# EAGLE board team18 (EAGLE 8.4.3)
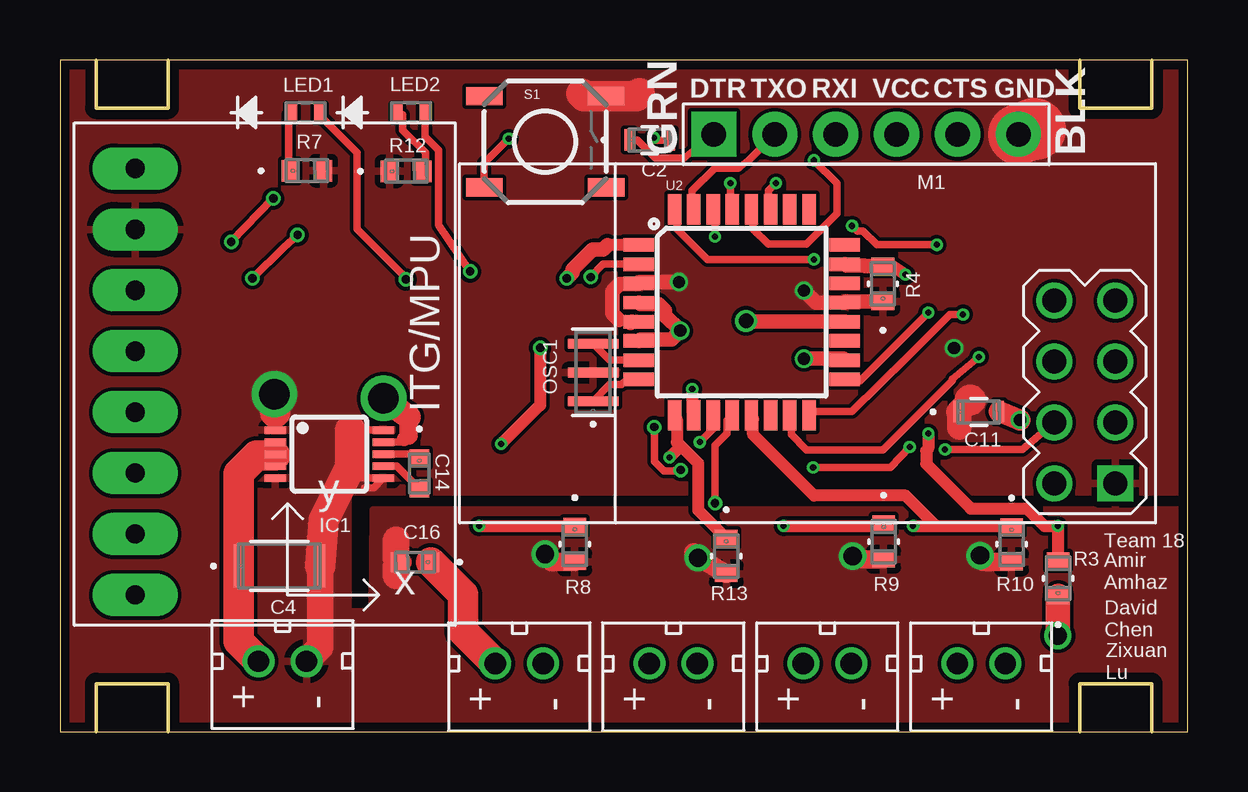
[diagram p0: board, top side]
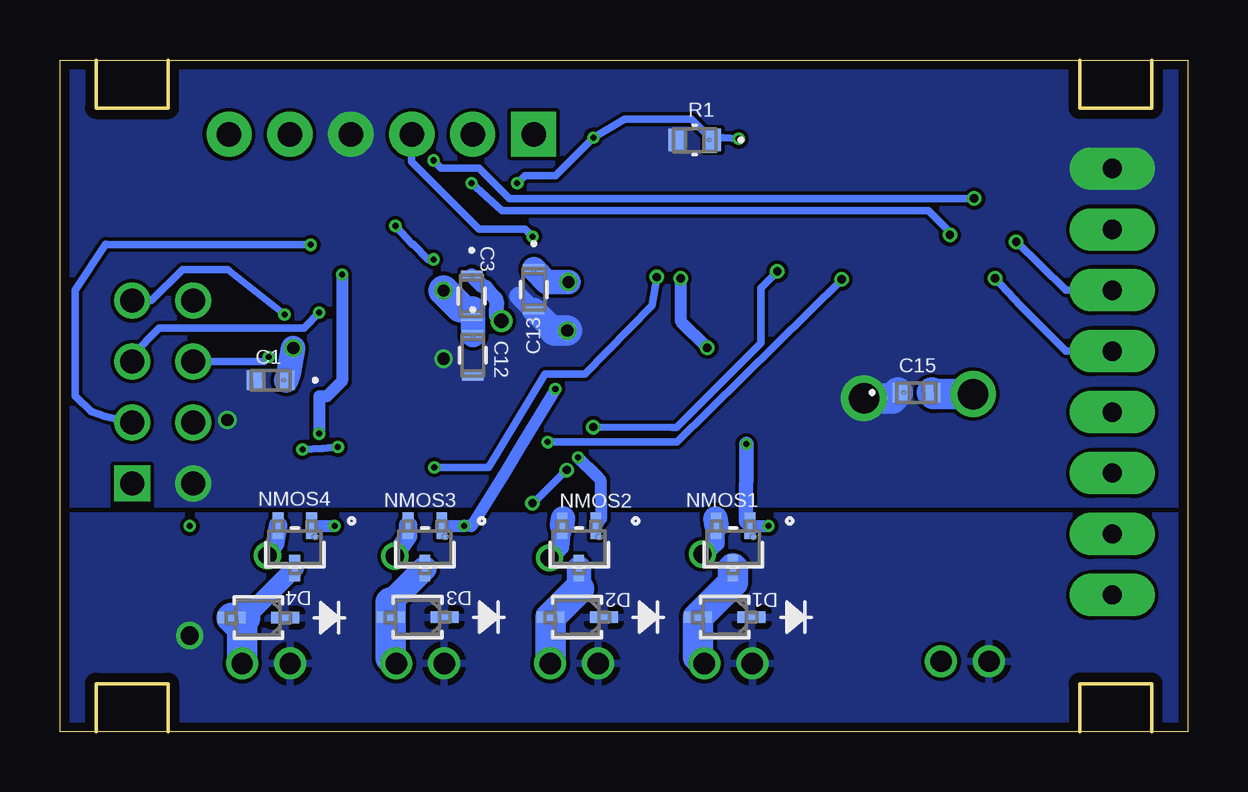
[diagram p1: board, bottom side, seen from below]

Size 47 x 28 mm. Coordinates in mm from the lower left corner, seen from the top.
Outline: 1.5,0 0,0 0,28 1.5,28
Outline: 1.5,0 4.5,0
Outline: 4.5,0 42.5,0
Outline: 42.5,0 45.5,0
Outline: 45.5,0 47,0 47,28 45.5,28
Outline: 45.5,28 42.5,28
Outline: 42.5,28 4.5,28
Outline: 4.5,28 1.5,28
Outline: 1.5,0 1.5,2 4.5,2 4.5,0
Outline: 45.5,0 45.5,2 42.5,2 42.5,0
Outline: 45.5,28 45.5,26 42.5,26 42.5,28
Outline: 1.5,28 1.5,26 4.5,26 4.5,28
Copper layers (1*16): Top 0.035559375mm / dielectric 1.6mm / Bottom 0.035559375mm
Design rules "oshpark-2layer": minimum track width 6mil, minimum drill 10mil, track to track 6mil, track to pad 6mil, pad to pad 6mil, via to via 6mil, smd to smd 6mil, copper to edge 15mil, drill to drill 6mil, minimum pad ring 5mil, minimum via ring 5mil, stop-mask expansion 2.5mil, vias tented up to drill 0mil, thermal gap 10mil
Net classes: 0 default: width 0.025 mm; 1 digital: width 0.025 mm; 2 analog: width 0.025 mm; 3 power: width 0.025 mm

## Footprints (pad centres in the part's own frame; a part is rotated, then mirrored left to right if it is on the bottom)
JST_CONNECTOR_FEMALE = drill 0.889: + 0,1; - 0,-1
G-188 = smd 0.711 x 0.813: 1 -0.648,0; 2 0.648,0
CAP_1608 = smd 0.406 x 0.889: 1 -0.851,0; 2 0.851,0
CAP_3216 = smd 0.406 x 1.803: 1 -1.702,0; 2 1.702,0
SOD-323 = smd 1.168 x 0.483: 1 -1.118,0; 2 1.118,0
UMAX10 = smd 0.32 x 0.9: 1 -1,-2.25; 2 -0.5,-2.25; 3 0,-2.25; 4 0.5,-2.25; 5 1,-2.25; 6 1,2.25; 7 0.5,2.25; 8 0,2.25; 9 -0.5,2.25; 10 -1,2.25
FTDI_DEVICE_SIDE = drill 1.016 pad 1.88 square: P$1 -6.35,0 | drill 1.016 pad 1.88: P$2 -3.81,0; P$3 -1.27,0; P$4 1.27,0; P$5 3.81,0; P$6 6.35,0
LED_DIALIGHT_598 = smd 0.445 x 0.711: 1 -0.578,0; 2 0.578,0
WIRELESS-NRF24L01 = drill 1 square: 1 -12.7,6.35 | drill 1: 2 -10.16,6.35; 3 -12.7,3.81; 4 -10.16,3.81; 5 -12.7,1.27; 6 -10.16,1.27; 7 -12.7,-1.27; 8 -10.16,-1.27
SOT-323W/NEW = smd 0.451 x 1.111: 1 -0.7,-0.9; 2 0.7,-0.9; 3 0.011,0.878
CSTCE = smd 0.406 x 2.108: 1 -1.2,0; 2 0,0; 3 1.2,0
0603 = smd 0.703 x 0.95: 1 -0.737,0; 2 0.737,0
BO_CR0603 = smd 0.711 x 0.889: 1 -0.699,0; 2 0.699,0
TACTILE_SWITCH_SMD = smd 1.524 x 0.762: 1 -2.54,1.905; 2 2.54,1.905; 3 -2.54,-1.905; 4 2.54,-1.905
GY-521 = drill 0.8 pad 1.778 long: ADO -8.89,-6.35; GND -8.89,6.35; INT -8.89,-8.89; SCL -8.89,3.81; SDA -8.89,1.27; VCC -8.89,8.89; XCL -8.89,-3.81; XDA -8.89,-1.27
TQFP32-08 = smd 1.27 x 0.559: 1 -4.293,2.8; 2 -4.293,2; 3 -4.293,1.2; 4 -4.293,0.4; 5 -4.293,-0.4; 6 -4.293,-1.2; 7 -4.293,-2; 8 -4.293,-2.8; 17 4.293,-2.8; 18 4.293,-2; 19 4.293,-1.2; 20 4.293,-0.4; 21 4.293,0.4; 22 4.293,1.2; 23 4.293,2; 24 4.293,2.8 | smd 0.559 x 1.27: 9 -2.8,-4.293; 10 -2,-4.293; 11 -1.2,-4.293; 12 -0.4,-4.293; 13 0.4,-4.293; 14 1.2,-4.293; 15 2,-4.293; 16 2.8,-4.293; 25 2.8,4.293; 26 2,4.293; 27 1.2,4.293; 28 0.4,4.293; 29 -0.4,4.293; 30 -1.2,4.293; 31 -2,4.293; 32 -2.8,4.293

## Placement (x,y rotation side)
BATTERY  JST_CONNECTOR_FEMALE  [JST_CONNECTOR_FEMALE]  9.27,2.93 90 top
C1  10µF  [G-188]  38.21,14.64 180 bottom
C2  100nF  [CAP_1608]  24.58,24.66 0 top
C3  100nF  [CAP_1608]  29.84,18.16 270 bottom
C4  100µF  [CAP_3216]  9.14,6.9 0 top
C11  100nF  [CAP_1608]  38.3,13.33 0 top
C12  100nF  [CAP_1608]  29.79,15.69 270 bottom
C13  100nF  [CAP_1608]  27.25,18.43 270 bottom
C14  0.33µF  [G-188]  14.98,10.76 270 top
C15  10µF  [G-188]  11.29,14.13 0 bottom
C16  10µF  [G-188]  14.8,7.07 180 top
D1  [SOD-323]  19.29,4.77 180 bottom
D2  [SOD-323]  25.44,4.77 180 bottom
D3  [SOD-323]  32.09,4.77 180 bottom
D4  [SOD-323]  38.73,4.74 180 bottom
IC1  MAX1759  [UMAX10]  11.22,11.57 270 top
J1  FTDI_DEVICE  [FTDI_DEVICE_SIDE]  33.6,24.9 0 top
LED1  [LED_DIALIGHT_598]  10.24,25.81 0 top
LED2  [LED_DIALIGHT_598]  14.64,25.81 0 top
M1  WIRELESS-NRF24L01  [WIRELESS-NRF24L01]  31.29,16.69 180 top
MOTOR1  JST_CONNECTOR_FEMALE  [JST_CONNECTOR_FEMALE]  19.14,2.84 90 top
MOTOR2  JST_CONNECTOR_FEMALE  [JST_CONNECTOR_FEMALE]  25.56,2.84 90 top
MOTOR3  JST_CONNECTOR_FEMALE  [JST_CONNECTOR_FEMALE]  31.98,2.84 90 top
MOTOR4  JST_CONNECTOR_FEMALE  [JST_CONNECTOR_FEMALE]  38.4,2.84 90 top
NMOS1  DMN3065LW-7  [SOT-323W/NEW]  18.94,7.69 180 bottom
NMOS2  DMN3065LW-7  [SOT-323W/NEW]  25.36,7.69 180 bottom
NMOS3  DMN3065LW-7  [SOT-323W/NEW]  31.78,7.69 180 bottom
NMOS4  DMN3065LW-7  [SOT-323W/NEW]  37.2,7.69 180 bottom
OSC1  [CSTCE]  22.22,14.97 90 top
R1  10K  [0603]  20.54,24.66 180 bottom
R3  10K  [0603]  41.6,6.38 90 top
R4  10K  [0603]  34.3,18.66 90 top
R7  330  [BO_CR0603]  10.29,23.38 0 top
R8  10K  [0603]  21.46,7.82 270 top
R9  10K  [0603]  34.33,7.92 270 top
R10  10K  [0603]  39.66,7.81 270 top
R12  330  [BO_CR0603]  14.43,23.36 0 top
R13  10K  [0603]  27.77,7.32 270 top
S1  [TACTILE_SWITCH_SMD]  20.22,24.59 0 top
U1  GY-521MPU6050  [GY-521]  12.02,14.59 0 top
U2  ATMEGA328P_TQFP  [TQFP32-08]  28.42,17.49 0 top

## Library data of the parts
BATTERY J1 M1 MOTOR1-MOTOR4 U1 = quad
C1 C15 C16 = Capacitor 10uF; MANUFACTURER_PART_NUMBER: GRM188R60J106ME47D; VENDOR: Murata
C2 C3 C11-C13 = Capacitor 100nF; MANUFACTURER_PART_NUMBER: C1608X5R1H104K080AA; VENDOR: TDK
C4 = Capacitor 100uF; MANUFACTURER_PART_NUMBER: C3216X5R0J107M160AB; VENDOR: TDK
C14 = Capacitor 0.33uF; MANUFACTURER_PART_NUMBER: GRM188R71C334KA01D; VENDOR: Murata
D1-D4 = Diode; MANUFACTURER_PART_NUMBER: BAT60JFILM; VENDOR: STMicroelectronics
IC1 = maxim; MF: MAXIM; MPN: MAX1759EUB+; OC_FARNELL: 1593325; OC_NEWARK: 61H9447
LED1 = LED Red; MANUFACTURER_PART_NUMBER: 5988070107F; VENDOR: Dialight
LED2 = LED Green; MANUFACTURER_PART_NUMBER: 5988070107F; VENDOR: Dialight
NMOS1-NMOS4 = NMOS
OSC1 = Resonator; MANUFACTURER_PART_NUMBER: CSTCE8M00G52R0; VENDOR: Murata
R1 R3 R4 R8-R10 R13 = Resistor 10K; MANUFACTURER_PART_NUMBER: MCT06030C1002FP500; VENDOR: Vishay
R7 R12 = Resistor 330; MANUFACTURER_PART_NUMBER: CR0603JW331ELF; VENDOR: Bourns Electronics
S1 = SparkFun
U2 = quad; PROD_ID: IC-09069

## Nets
CE [digital]: M1.3 U2.32
CSN [digital]: M1.4 U2.2
GND [power]: BATTERY.- C1.1 C3.2 C4.2 C11.1 C12.1 C13.1 C15.2 C16.2 IC1.1 IC1.5 IC1.6 IC1.10 J1.P$6 M1.1 NMOS1.2 NMOS2.2 NMOS3.2 NMOS4.2 OSC1.2 R4.1 R7.2 R8.2 R9.2 R10.2 R12.1 R13.2 S1.2 U1.GND U2.3 U2.5 U2.21
MISO [digital]: M1.7 U2.16
MOSI [digital]: M1.6 U2.15
MOTORPWM1 [analog]: NMOS1.1 R8.1 U2.1
MOTORPWM2 [analog]: NMOS2.1 R13.1 U2.9
MOTORPWM3 [analog]: NMOS3.1 R9.1 U2.10
MOTORPWM4 [analog]: NMOS4.1 R10.1 U2.13
N$1 [power]: D2.2 MOTOR2.- NMOS2.3
N$2 [power]: C14.1 IC1.8
N$3 [power]: D3.2 MOTOR3.- NMOS3.3
N$4 [power]: D4.2 MOTOR4.- NMOS4.3
N$5 [digital]: C2.2 R1.1 S1.3 U2.29
N$6 [power]: D1.2 MOTOR1.- NMOS1.3
N$7 [digital]: C2.1 J1.P$1
N$8 [power]: C14.2 IC1.7
N$9 [digital]: LED1.2 U2.11
N$11 [digital]: LED2.2 U2.12
N$12 [power]: C3.1 U2.20
N$13 [digital]: LED1.1 R7.1
N$14 [digital]: OSC1.3 U2.7
N$15 [digital]: OSC1.1 U2.8
N$16 [digital]: LED2.1 R12.2
RX1 [digital]: J1.P$3 U2.30
SCK [digital]: M1.5 U2.17
SCL [digital]: U1.SCL U2.28
SDA [digital]: U1.SDA U2.27
TX0 [digital]: J1.P$2 U2.31
VBAT [power]: BATTERY.+ C4.1 C16.1 D1.1 D2.1 D3.1 D4.1 IC1.2 IC1.3 IC1.4 MOTOR1.+ MOTOR2.+ MOTOR3.+ MOTOR4.+ R3.1
VOLTAGEDIVIDER [analog]: R3.2 R4.2 U2.23
VREG [power]: C1.2 C11.2 C12.2 C13.2 C15.1 IC1.9 J1.P$4 M1.2 R1.2 U1.VCC U2.4 U2.6 U2.18

## Tracks (layer width: path | path; a pad name or v marks a point on that pad's centre or on a via)
CE  (via drill 0.25)
  Top 0.305: v31.43,19.68 26.99,19.68 25.72,20.95 25.72,21.59 U2.32 | v33.02,21.08 33.23,20.87 33.48,20.87 34.05,20.3 v36.55,20.3
  Bottom 0.305: v31.43,19.68 31.65,19.68 32.28,20.32 32.31,20.3 v33.02,21.08 | M1.3 45.11,13.13 45.71,13.34 46.35,13.98 46.35,18.41 45.09,20.32 45.06,20.3 v36.55,20.3
CSN  (via drill 0.25, 0.35)
  Top 0.305: v36.89,11.76 40.12,11.76 M1.4 41.45,12.87 M1.4 | 23.81,19.37 U2.2 | U2.2 24.07,19.43 | v22.12,18.95 22.64,19.49 U2.2 | v31.39,11.01 34.62,11.01 v35.42,11.86
  Bottom 0.305: v22.12,18.95 22.33,17.75 25.11,14.9 26.77,14.9 29.13,11.01 v31.39,11.01 | v35.42,11.86 36.05,11.81 v36.89,11.76
GND  (via drill 0.51, 0.76, 1.27)
  Top 0.254: C16.2 14,6.91 | C11.1 37.49,13.28
  Top 0.305: IC1.10 12.1,12.57 12.09,12.57 | 11.99,10.83 11.75,10.57 IC1.6 13.07,10.16 12.7,10.16 | IC1.1 8.97,13.3 8.97,13.31
  Top 0.61: 23.85,17.09 23.79,17.02 | 23.3,17.15 23.04,17.42 23.04,18.36 23.33,18.65 24.09,18.65 U2.3 24.19,18.75 v25.81,18.75 | v31.01,18.39 31.52,17.89 U2.21 32.75,17.93 R4.1
  Top 0.762: R8.2 20.48,7.08 v20.22,7.39 | R13.2 26.83,7.14 26.72,7.14 26.4,7.47 v26.59,7.24 | R9.2 33.45,7.19 v33.05,7.32 | R10.2 38.5,7.07 v38.35,7.34
  Top 1: C16.2 14,7.22
  Top 1.016: 37.49,13.28 37.49,12.68 | C11.1 37.93,13.82
  Top 1.1: 14,7.22 14,8 | BATTERY.- 10.85,3.5 C4.2 | 14,6.91 14,6.5
  Top 1.27: 12.1,12.57 12.09,12.56 12.09,10.97 11.99,10.83 10.99,8.79 C4.2 | v8.94,14.07 8.97,14.05 8.97,13.31 | 24.16,26.62 24.03,26.49 S1.2 21.84,26.49 21.74,26.59 | 37.93,13.82 37.97,13.82
  Top 2.54: J1.P$6 40.61,25.15 40.66,25.09
  Bottom 0.762: v20.22,7.39 19.68,7.87 19.68,8.89 | v26.59,7.24 26.16,7.7 26.04,8.89 | v33.05,7.32 32.48,8.16 NMOS3.2 | v38.35,7.34 38.03,7.84 NMOS4.2
  Bottom 1.016: C12.1 29.79,17.64 C3.2 30.31,17.69 | C13.1 26.71,18.75 v25.81,18.75 | v37.27,15.99 37.47,14.92 C1.1 | 19.68,8.89 NMOS1.2 | 26.04,8.89 NMOS2.2
  Bottom 1.27: v8.94,14.07 10.59,14.07 C15.2 | 30.31,17.69 v31.01,18.39
  pour Top (rank 2): 13.55,0 9.3,-0.05 9.25,5 13,5 13.05,9.25 47,9.25 47,0
  pour Top (rank 2): 0,28 47,28 47,10 12,10 12,0 0,0
MISO  (via drill 0.25)
  Top 0.305: U2.16 31.43,13.34 33.02,13.34 35.31,15.61 37.09,17.39 v37.64,17.39
  Bottom 0.305: v37.64,17.39 40.01,19.27 41.89,19.27 43.19,17.96 M1.7
MOSI  (via drill 0.25)
  Top 0.305: U2.15 30.48,13.02 30.48,12.38 31.11,11.75 34.31,11.75 37.2,14.64 37.2,14.69 v38.3,15.62
  Bottom 0.305: 38.18,15.67 v38.3,15.62 38.5,15.42 M1.6
MOTORPWM1  (via drill 0.25, 0.35)
  Top 0.508: v17.46,8.57 21.27,8.57 R8.1 | U2.1 22.82,20.29 | v20.02,16 20.02,13.61 v18.39,11.99
  Top 0.61: 22.82,20.29 22.63,20.1 22.38,20.1 22.37,20.09 22.19,20.09 21.36,19.26 21.36,19.13 v21.13,18.9
  Bottom 0.508: v17.46,8.57 18.1,8.57 NMOS1.1 | v21.13,18.9 21.13,17.12 v20.02,16
  Bottom 0.61: v18.39,11.99 18.41,8.76 NMOS1.1
MOTORPWM2  (via drill 0.25)
  Top 0.508: 25.88,11.91 25.72,12.06 25.72,13.02 U2.9 | 25.88,11.91 v25.4,11.43 | 25.88,11.91 26.59,11.19 26.59,9.23 R13.1
  Bottom 0.508: NMOS2.1 24.45,8.89 24.47,10.49 24.64,10.67 v25.4,11.43
MOTORPWM3  (via drill 0.25)
  Top 0.508: v30.16,8.57 34.29,8.57 R9.1 | v26.35,14.29 26.35,13.34 U2.10
  Bottom 0.508: NMOS3.1 31.11,8.57 v30.16,8.57 29.84,8.57 28.55,10.64 27.65,12.13 v26.35,14.29
MOTORPWM4  (via drill 0.25)
  Top 0.508: v35.56,8.57 36.51,8.57 | 36.51,8.57 39.37,8.57 R10.1 | 36.51,8.57 35.24,9.84 31.43,9.84 28.89,12.38 28.89,13.02 U2.13
  Bottom 0.508: v35.56,8.57 36.51,8.57 NMOS4.1
N$1
  Bottom 1.016: NMOS2.3 25.38,5.95
  Bottom 1.27: 25.38,5.95 D2.2 MOTOR2.-
N$2
  Top 0.305: IC1.8 14.54,11.57 C14.1
N$3
  Bottom 1.016: NMOS3.3 33.21,5.39
  Bottom 1.27: 33.21,5.39 D3.2 33.21,3.06 MOTOR3.-
N$4
  Bottom 0.762: NMOS4.3 39.28,4.74
  Bottom 1.27: 39.28,4.74 D4.2 39.4,4.3 MOTOR4.-
N$5  (via drill 0.25)
  Top 0.305: v27.94,22.86 27.94,21.91 U2.29 | 18.1,22.86 S1.3 17.68,23.69 v18.71,24.71 | v24.77,24.77 24.87,24.66 C2.2
  Bottom 0.305: v27.94,22.86 27.62,23.18 26.35,23.18 v24.77,24.77 23.47,25.53 20.67,25.53 R1.1 19.68,24.77 19.37,24.77 v18.71,24.71
N$6
  Bottom 1.27: NMOS1.3 18.95,6.22 D1.2 20.41,3.1 MOTOR1.-
N$7
  Top 0.305: C2.1 24.08,24.66 24.83,23.91 26.01,23.91 J1.P$1
N$8
  Top 0.305: IC1.7 14.03,11.07 C14.2
N$9  (via drill 0.25, 0.35)
  Top 0.305: v26.67,12.06 27.3,12.7 27.3,13.02 U2.11 | LED1.2 10.79,25.72 12.38,24.13 12.38,20.95 14.41,18.92 v14.41,18.85
  Bottom 0.305: v14.41,18.85 21.27,12.06 v26.67,12.06
N$11  (via drill 0.35)
  Top 0.305: 15.24,25.72 LED2.2 15.22,24.8 15.79,24.23 15.79,21.12 v17.09,19.18 | v27.3,9.53 27.3,11.93 27.81,12.43 27.81,12.98 U2.12 | v25.88,10.9 25.66,10.9 25.63,10.87 25.17,10.87 24.77,11.27 v24.77,12.7
  Bottom 0.305: v24.77,12.7 21.47,12.67 21.31,12.67 21.27,12.71 17.78,16.2 17.78,18.49 v17.09,19.18 | v25.88,10.9 27.25,9.53 v27.3,9.53
N$12  (via drill 0.61)
  Top 0.61: U2.20 28.69,17.09 v28.6,17.12
  Bottom 0.61: v28.6,17.12 28.83,17.35 28.83,17.57 28.78,17.89 28.83,17.96 28.83,18.04 29.06,18.27 29.26,18.53 29.34,18.55 29.39,18.6 29.43,18.6 C3.1
N$13
  Top 0.305: LED1.1 9.53,25.72 9.53,23.5 R7.1
N$14
  Top 0.305: 23.97,15.4 U2.7 | 23.81,15.56 U2.7 | U2.7 22.91,15.49 OSC1.3
N$15
  Top 0.305: 23.97,14.76 U2.8 | 23.81,14.61 U2.8 | OSC1.1 22.91,14.46 23.4,14.46 23.63,14.69 U2.8
N$16
  Top 0.305: LED2.1 14.29,25.72 14.29,25.08 15.24,24.13 15.24,23.5 R12.2
RX1  (via drill 0.25)
  Top 0.305: v27.3,20.64 27.3,21.59 U2.30
  Bottom 0.305: v27.3,20.64 27.62,20.95 29.53,20.95 32.34,23.76 J1.P$3
SCK  (via drill 0.25)
  Top 0.305: v36.2,17.46 33.34,14.61 33.02,14.61 U2.17
  Bottom 0.305: v36.2,17.46 36.83,16.83 42.86,16.83 43.99,15.68 M1.5
SCL  (via drill 0.25, 0.35)
  Top 0.305: v31.43,23.81 32.38,22.86 32.38,21.59 31.11,20.32 29.53,20.32 28.89,20.95 28.89,21.59 U2.28 | v7.14,20.42 8.87,22.23 v8.89,22.23
  Bottom 0.305: v31.43,23.81 31.11,23.5 29.53,23.5 28.26,22.23 v8.89,22.23 | U1.SCL 3.17,18.41 5.08,18.41 v7.14,20.42
SDA  (via drill 0.25, 0.35)
  Top 0.305: v29.84,22.86 29.53,22.54 29.53,21.91 U2.27 | v8.03,18.9 9.32,20.17 v9.91,20.7
  Bottom 0.305: v29.84,22.86 28.57,21.72 10.79,21.72 9.91,20.83 v9.91,20.7 | U1.SDA 3.17,15.88 5.08,15.88 6.96,17.75 v8.03,18.9
TX0
  Top 0.305: U2.31 26.35,21.91 26.35,22.54 27.3,23.5 28.28,23.5 28.78,23.89 J1.P$2
VBAT  (via drill 0.76)
  Top 0.305: IC1.2 IC1.3 8.97,11.51 IC1.4
  Top 1.016: v41.59,4 41.59,5.4 R3.1
  Top 1.25: C16.1 16.8,5.71
  Top 1.27: BATTERY.+ 7.44,3.76 C4.1 7.44,10.76 8.2,11.51 8.97,11.51 | MOTOR1.+ 16.8,4.18 16.8,5.71
  pour Bottom: 47,9 47,0 0,0 0,9
VOLTAGEDIVIDER  (via drill 0.25)
  Top 0.508: v35.24,19.05 34.71,19.41 R4.2 | R3.2 41.59,7.3 v41.59,8.57 41.04,8.57 40.31,9.3 37.96,9.3 36.11,11.16 36.11,11.7 36.2,11.79 v36.2,12.42
  Top 0.61: U2.23 32.78,19.42 33.54,19.42 33.56,19.4 R4.2
  Bottom 0.508: v35.24,19.05 35.24,14.61 35.88,13.97 36.2,13.97 v36.2,12.42
VREG  (via drill 0.51, 1.27)
  Top 0.305: 14.43,13.03 14.53,13.11 | IC1.9 14.22,12.07 14.35,12.19
  Top 0.61: 13.82,13.64 13.79,13.64 | U2.4 24.19,17.82 24.95,17.82 25.22,17.56 25.22,17.35 v25.86,16.71 25.49,16.35 24.19,16.35 U2.6 | v31.01,15.54 32.66,15.54 U2.18 | 14.35,12.19 14.53,12.34
  Top 0.762: 14.53,12.34 14.53,13.11 | 39.15,13.35 C11.2
  Top 0.889: v40.02,12.99 39.15,13.35
  Top 1.016: 14.53,13.11 13.82,13.64
  Top 1.27: 13.79,13.64 13.54,13.89 v13.49,13.89
  Bottom 0.762: C13.2 27.31,17.58 27.89,18.16
  Bottom 1.016: C13.2 26.38,16.71
  Bottom 1.27: v13.49,13.89 12.31,13.89 12.07,14.13 | 26.38,16.71 v25.86,16.71
  pour Bottom (no thermals): 0,28 47,28 47,9.5 0,9.5

## Text on the board
tPlace: Team 18 | Amir / Amhaz | David / Chen | Zixuan / Lu